# Altium PCB doorcontrollerv2.PcbDoc
Units mil, origin at the board's own origin, x right, y up, seen from the top; angles counter-clockwise.
Board outline 2665 x 1505 mil, 2 copper layers (Top Layer, Bottom Layer); 51 components, 62 nets, 230 pads, 48 vias.
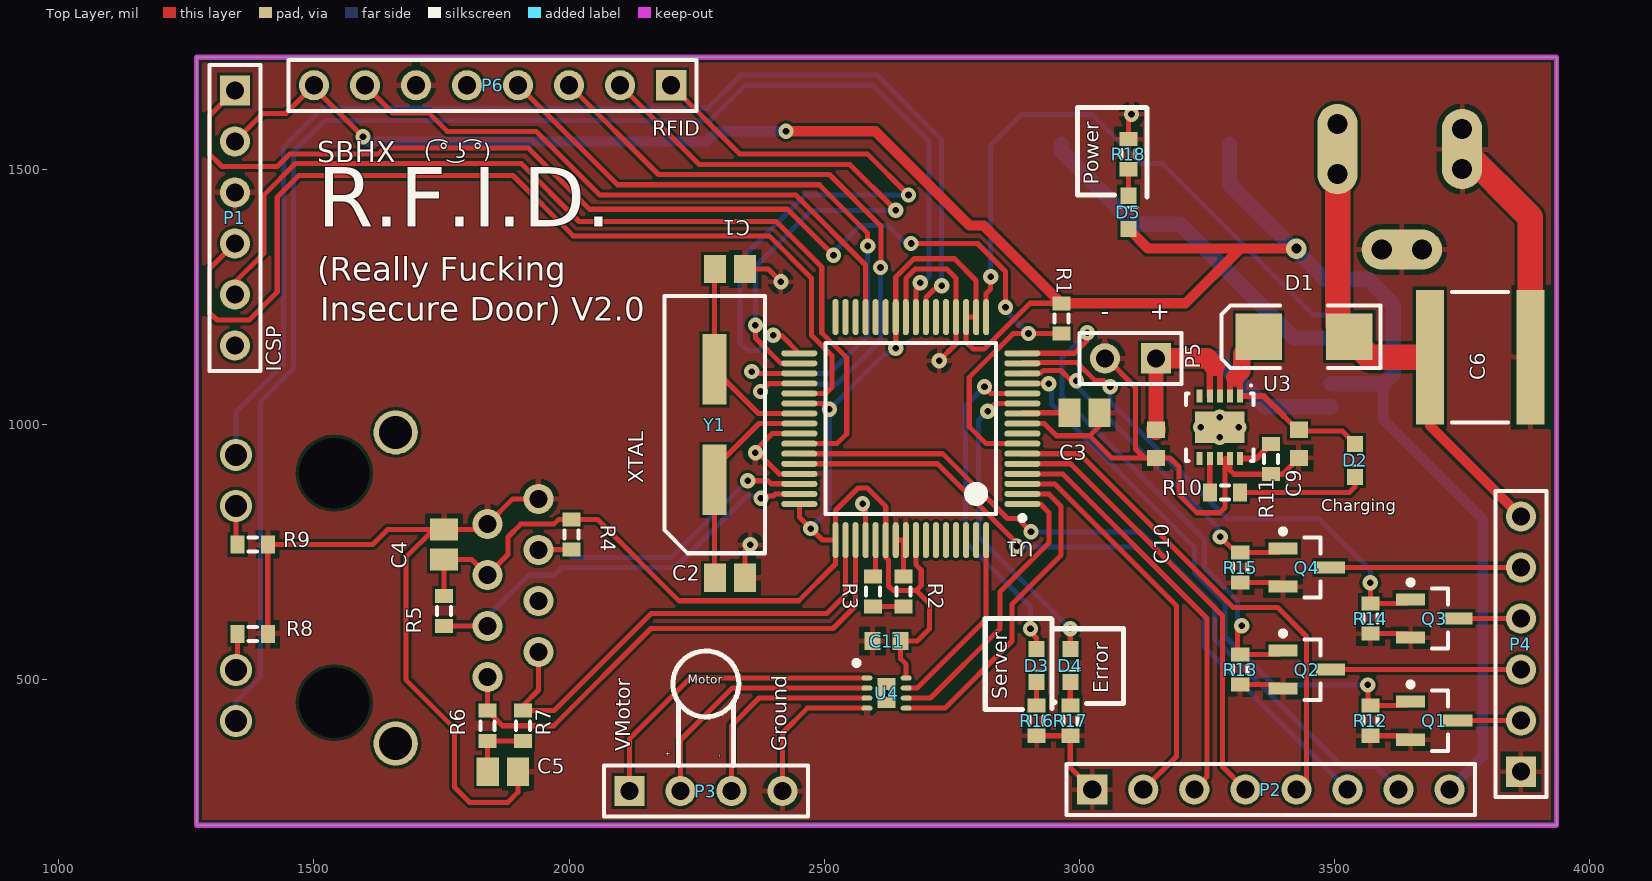
[diagram p0: Top Layer view]
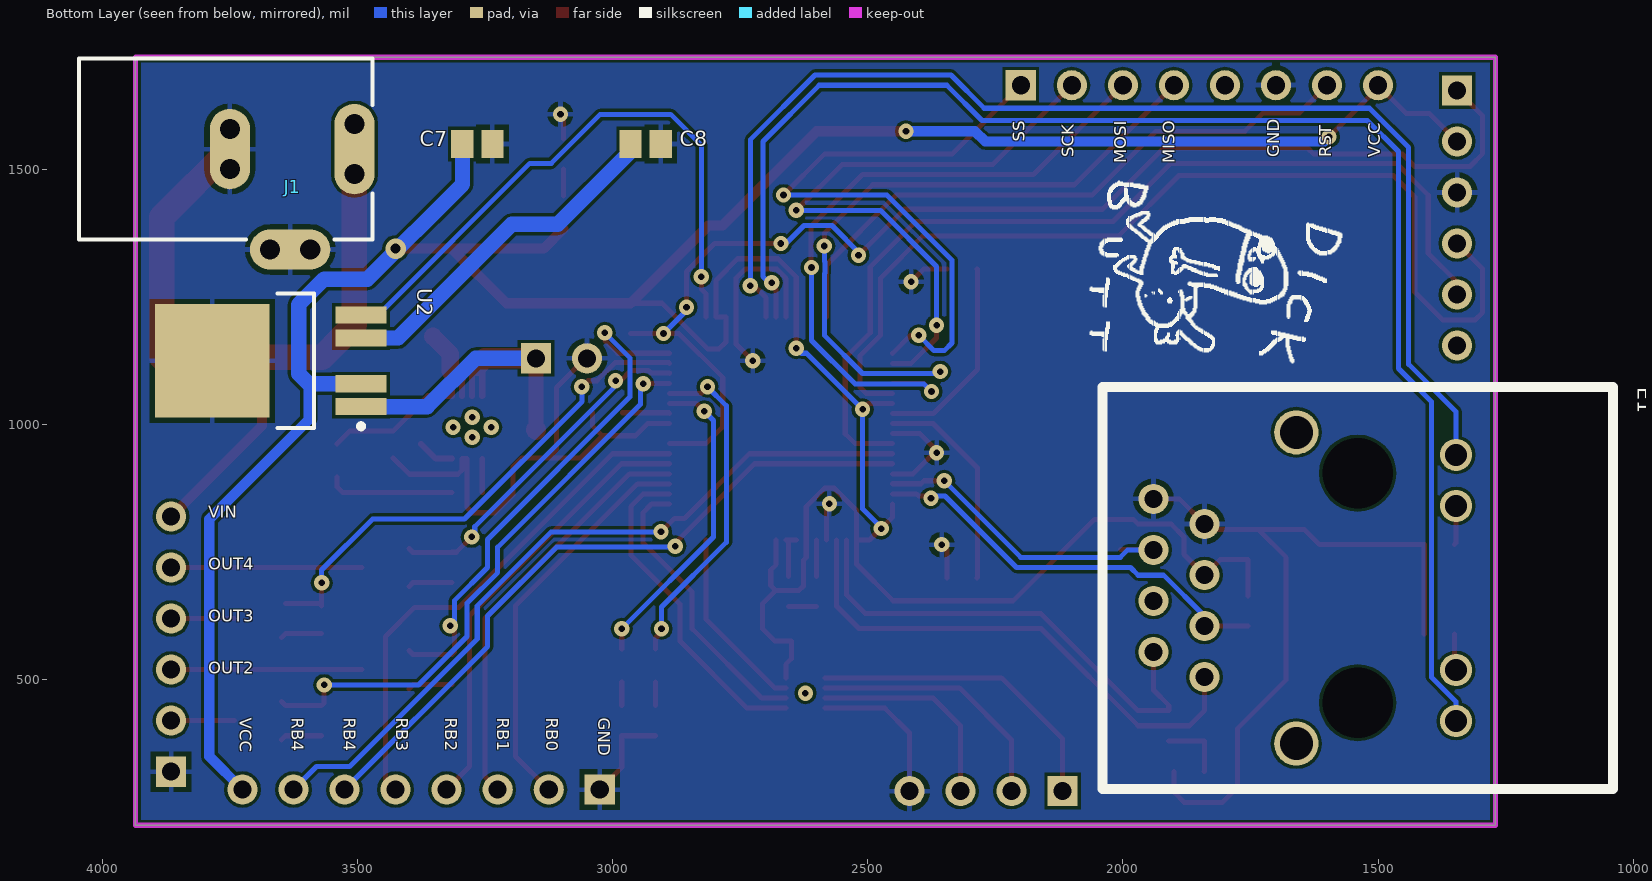
[diagram p1: Bottom Layer view, seen from below]

## Layer stack, top to bottom
Top Solder: solder mask 0.4, Solder Resist, Dk 3.5
Top Layer: signal copper 1.4
Dielectric1: dielectric 12.6, FR-4, Dk 4.8
Bottom Layer: signal copper 1.4
Bottom Solder: solder mask 0.4, Solder Resist, Dk 3.5

## Board outline
1270,215 1270,1720 3935,1720 3935,215

## Design rules (kind name [scope] priority, off if disabled: settings)
Clearance [All] p1: gap=6
DiffPairsRouting [All] p1: maxlimit=10 minlimit=5 mostfreqgap=10 toplayer_minwidth=10 toplayer_maxwidth=15 toplayer_prefwidth=15 bottomlayer_minwidth=10 bottomlayer_maxwidth=15 bottomlayer_prefwidth=15 maxuncoupledlength=500
HoleSize [All] p1: absolutevalues=TRUE maxlimit=265 minlimit=13 maxpercent=80.000 minpercent=20.000
MinimumAnnularRing [All] p1: minimumring=7
MinimumSolderMaskSliver [All] p1: minsoldermaskwidth=5
PolygonConnect [All] p1: connectstyle=Relief reliefconductorwidth=10 reliefentries=4 polygonreliefangle="90 Angle" airgapwidth=10
RoutingVias [All] p1: holewidth=28 width=50 viastyle="Through Hole" minholewidth=28 minwidth=50 maxholewidth=28 maxwidth=50
SilkToSolderMaskClearance SilkscreenOverComponentPads [IsPad] p1: minsilkscreentomaskgap=10 clearancetoexposedcopper=TRUE
SolderMaskExpansion [All] p1: expansion=4
Width [All] p1: maxlimit=200 minlimit=6 preferedwidth=10
26 further rules are at their usual default settings.

## Classes and differential pairs
net class RF[1..7]: RF0 RF1 RF2 RF3 RF4 RF5 RF6 RF7
net class RE[0..5]: RE0 RE1 RE2 RE3 RE4 RE5
component class U_EthernetPhy: C4 C5 E1 R4 R5 R6 R7 R8 R9
component class U_Processor: C1 C2 C3 C11 P1 R1 R2 R3 U1 Y1
component class DoorControllerv2: D3 D4 D5 P2 P3 P4 P6 Q1 Q2 Q3 Q4 R12 R13 R14 R15 R16 R17 R18 U4
net class RB[0..5]: RB0 RB1 RB2 RB3 RB4 RB5
component class U_PowerInput: C6 C7 C8 J1 U2
component class U_LiPoCharger: C9 C10 D1 D2 P5 R10 R11 U3
differential pair TPOUT: +TPOUT_P -TPOUT_N
differential pair TPIN: +TPIN_P -TPIN_N
differential pair XTAL: +XTAL_P -XTAL_N

## Components (designator, comment, footprint, x,y, rotation, side; value= is the part's Value field where it differs from the comment)
C1 "Cap Pol3" C0805 2315,1305 r0 top
C2 "Cap Pol3" C0805 2315,700 r0 top
C3 "Cap Pol3" C0805 3010,1023.27 r0 top
C4 "Cap Pol3" C0805 1755,765 r90 top
C5 "Cap Pol3" C0805 1870,320 r0 top
C6 "Cap Pol3" C2225 3785,1132.44 r0 top
C7 "Cap Pol3" C0805 3265,1550 r180 bottom
C8 "Cap Pol3" C0805 2935,1550 r180 bottom
C9 "Cap Semi" 1608[0603] 3430,962.44 r90 top
C10 "Cap Semi" 1608[0603] 3150,962.44 r90 top
C11 "Decoupling" 1608[0603] 2622,576 r180 top
D1 "SK33A" SMB 3440,1172.44 r180 top
D2 "LED0" "0603 LED" 3540,930 r270 top
D3 "Status1" "0603 LED" 2916,528 r270 top
D4 "Status2" "0603 LED" 2982,528 r270 top
D5 "Power" "0603 LED" 3096,1416 r90 top
E1 "8P8 MagJack" HR911105 1540,680 r270 bottom
J1 "PWR2.5" KLD-0202 4045,1540 r180 bottom
P1 "ICSP" HDR1X6 1345,1655 r270 top
P2 "Header 8" HDR1X8 3025,285 r0 top
P3 "Motor" HDR1X4 2118,282 r0 top
P4 "Header 6" HDR1X6 3865,320 r90 top
P5 "Battery Input" HDR1X2 3150,1130 r180 top
P6 "RFID" HDR1X8 2200,1665 r180 top
Q1 "NFET" SOT-23_M 3695,420 r0 top
Q2 "NFET" SOT-23_M 3445,520 r0 top
Q3 "NFET" SOT-23_M 3695,620 r0 top
Q4 "NFET" SOT-23_M 3445,720 r0 top
R1 "Res3" J1-0603 2964.53,1208.27 r270 top
R2 "Res3" J1-0603 2655,673.27 r270 top
R3 "Res3" J1-0603 2595,673.27 r90 top
R4 "Termination" J1-0603 2005,785 r90 top
R5 "Termination" J1-0603 1755,635 r90 top
R6 "Termination" J1-0603 1840,410 r270 top
R7 "Termination" J1-0603 1910,410 r270 top
R8 "Current Limit" J1-0603 1380,590 r180 top
R9 "Current Limit" J1-0603 1380,765 r180 top
R10 "Res3" J1-0603 3285,867.44 r0 top
R11 "" J1-0603 3375,932.44 r90 top
R12 "Res3" J1-0603 3570,420 r90 top
R13 "Res3" J1-0603 3315,520 r90 top
R14 "Res3" J1-0603 3570,620 r90 top
R15 "Res3" J1-0603 3315,720 r90 top
R16 "Res3" J1-0603 2916,420 r90 top
R17 "Res3" J1-0603 2982,420 r90 top
R18 "Res3" J1-0603 3096,1530 r270 top
U1 "PIC18F67J60-I/PT" TQFP-PT64_N 2669.53,992.24 r180 top
U2 "TLE4476" P-TO252-5-1 3670,1125 r0 bottom
U3 "MCP73213-A6AI/MF" DFN-MF10 3275,995 r270 top
U4 "1.8A H-Bridge" S-PWSON-N8 2622,474 r0 top
Y1 "XTAL" CSM-3X 2285,1000 r90 top

## Footprints (in the part's own frame and the unit in brackets; to place one, negate y for a bottom-side part, rotate by r counter-clockwise, add the part's x,y. Pads: shape width x height; smd on the part's side, far side on the other; paste and mask are expansions set on the pad)
"0603 LED" [mm]
  rect 0.8x0.8 smd: 1(-0.825,0) 2(0.825,0)
  silkscreen extent 0.25,-0.46 0.25,0.46
1608[0603] [mm] "Chip Capacitor, Body 1.6x0.8mm, IPC High Density"
  rect 0.8x0.9 smd: 1(-0.7,0) 2(0.7,0)
  body extent -0.87,-0.48 0.87,0.48, height 1.3
C0805 [mm] "Chip Capacitor, Body 2.0x1.3mm, IPC High Density"
  rect 1.1x1.4 smd: 1(-0.75,0) 2(0.75,0)
  body extent -1.1,-0.72 1.1,0.72, height 1.4
C2225 [mm] "Chip Capacitor, Body 5.7x6.4mm, IPC High Density"
  rect 1.4x6.7 smd: 1(-2.5,0) 2(2.5,0)
  silkscreen extent -1.4,-3.25 1.4,3.25, body extent -2.95,-3.4 2.95,3.4, height 1.4
CSM-3X [mm]
  rect 3.5x1.2 smd: 1(-2.75,0) 2(2.75,0)
  silkscreen extent -6.4,-2.5 6.4,2.5
DFN-MF10 [mm] "SON, 10-Leads, Body 3x3mm, Pitch 0.5mm, Microchip Recommended"
  rect 0.65x0.3 smd: 1(-1.55,1) 2(-1.55,0.5) 3(-1.55,0) 4(-1.55,-0.5) 5(-1.55,-1) 6(1.55,-1) 7(1.55,-0.5) 8(1.55,0) 9(1.55,0.5) 10(1.55,1)
  rect 1.55x2.48 smd: 11(0,0)
  silkscreen extent -2.12,-1.68 1.67,1.68, body extent -1.52,-1.52 1.52,1.52, height 1
HDR1X2 [mm] "Connector; Header; 2 Position"
  rect 1.5x1.5 hole 0.9: 1(0,0)
  round 1.5 hole 0.9: 2(2.54,0)
  silkscreen extent -1.27,-1.27 3.81,1.27
HDR1X4 [mm] "Connector; Header; 4 Position"
  rect 1.5x1.5 hole 0.9: 1(0,0)
  round 1.5 hole 0.9: 2(2.54,0) 3(5.08,0) 4(7.62,0)
  silkscreen extent -1.27,-1.27 8.89,1.27
HDR1X6 [mm] "Connector; Header; 6 Position"
  rect 1.5x1.5 hole 0.9: 1(0,0)
  round 1.5 hole 0.9: 2(2.54,0) 3(5.08,0) 4(7.62,0) 5(10.16,0) 6(12.7,0)
  silkscreen extent -1.27,-1.27 13.97,1.27
HDR1X8 [mm] "Connector; Header; 8 Position"
  rect 1.5x1.5 hole 0.9: 1(0,0)
  round 1.5 hole 0.9: 2(2.54,0) 3(5.08,0) 4(7.62,0) 5(10.16,0) 6(12.7,0) 7(15.24,0) 8(17.78,0)
  silkscreen extent -1.27,-1.27 19.05,1.27
HR911105 [mm] "HANRUN Ethernet MagJack"
  round 1.5 hole 0.9: 1(4.436,-7.62) 2(3.184,-10.16) 3(1.896,-7.62) 4(0.644,-10.16) 5(-0.644,-7.62) 6(-1.896,-10.16) 7(-3.184,-7.62) 8(-4.436,-10.16)
  round 1.6 hole 1.1: 9(6.625,4.9) 10(4.085,4.9) 11(-4.085,4.9) 12(-6.625,4.9)
  round 2.2 hole 1.65 unplated: NC(-7.745,-3.05) NC(7.745,-3.05)
  rect 1.5x1.5 hole 3.5 unplated: NC(-5.715,0) NC(5.715,0)
  silkscreen extent -10,-12.7 10,12.7
J1-0603 [mm] "Chip Resistor, Body 1.6x0.8mm, IPC High Density"
  rect 0.7x0.9 smd: 1(-0.75,0) 2(0.75,0)
  silkscreen extent -0.2,-0.35 0.2,0.35, body extent -0.85,-0.48 0.85,0.48, height 0.9
KLD-0202 [mm] "DC Power Jack, 2.5mm, KLD Series, PCB Mount"
  oval 2x4.5 all layers, no hole: 1(13.7,0)
  round 1.5 hole 1: 1A(13.7,-1.25) 1B(13.7,1.25) 2A(7.5,-1) 2B(7.5,1) 3A(9.5,-5) 3B(11.5,-5)
  oval 2x4 all layers, no hole: 2(7.5,0)
  oval 4x2 all layers, no hole: 3(10.5,-5)
  silkscreen extent 0,-4.5 14.6,4.5
P-TO252-5-1 [mm] "D-PAK, 5-Pads, Body 6.21x6.69mm (max), IPC Low Density"
  rect 2.55x0.85 smd: 1(-4.5,2.28) 2(-4.5,1.14) 4(-4.5,-1.14) 5(-4.5,-2.28)
  rect 5.7x5.65 smd: 3(2.9,0)
  silkscreen extent -4.62,-3.35 -0.35,3.38, body extent -2.15,-3.32 4.07,3.32, height 2.3
S-PWSON-N8 [mm] "WSON, 8-Leads, Body 2.00x2.00mm, Pitch 0.50mm, Thermal Pad 0.90x1.50mm, IPC Low Density"
  oval 0.55x0.25 smd: 1(-0.975,0.75) 2(-0.975,0.25) 3(-0.975,-0.25) 4(-0.975,-0.75) 5(0.975,-0.75) 6(0.975,-0.25) 7(0.975,0.25) 8(0.975,0.75)
  rect 0.9x1.5 smd: 9(0,0)
  silkscreen extent -1.62,1.38 -1.37,1.62, body extent -1.05,-1.05 1.05,1.05, height 1
SMB [mm] "DO-214-AA/SMB; 2 C-Bend Leads; Body 5.3 x 3.6 mm, inc. leads (LxW)"
  rect 2.3x2.3 smd: 1(-2.25,0) 2(2.25,0)
  silkscreen extent -3.8,-1.55 4.1,1.55
SOT-23_M [mm] "SOT23, 3-Leads, Body 2.9x1.3mm, Pitch 0.95mm, Lead Span 2.5mm, IPC Low Density"
  rect 1.45x0.6 smd: 1(-1.175,0.95) 2(-1.175,-0.95) 3(1.175,0)
  silkscreen extent -1.3,-1.5 0.7,1.92, body extent -0.7,-1.5 0.7,1.5, height 1.1
TQFP-PT64_N [mm] "Thin QFP, 64-Leads, Body 10x10mm, Pitch 0.5mm, IPC Medium Density"
  oval 1.8x0.3 smd: 1(-5.55,3.75) 2(-5.55,3.25) 3(-5.55,2.75) 4(-5.55,2.25) 5(-5.55,1.75) 6(-5.55,1.25) 7(-5.55,0.75) 8(-5.55,0.25) 9(-5.55,-0.25) 10(-5.55,-0.75) 11(-5.55,-1.25) 12(-5.55,-1.75) 13(-5.55,-2.25) 14(-5.55,-2.75) 15(-5.55,-3.25) 16(-5.55,-3.75) 33(5.55,-3.75) 34(5.55,-3.25) 35(5.55,-2.75) 36(5.55,-2.25) 37(5.55,-1.75) 38(5.55,-1.25) 39(5.55,-0.75) 40(5.55,-0.25) 41(5.55,0.25) 42(5.55,0.75) 43(5.55,1.25) 44(5.55,1.75) 45(5.55,2.25) 46(5.55,2.75) 47(5.55,3.25) 48(5.55,3.75)
  oval 0.3x1.8 smd: 17(-3.75,-5.55) 18(-3.25,-5.55) 19(-2.75,-5.55) 20(-2.25,-5.55) 21(-1.75,-5.55) 22(-1.25,-5.55) 23(-0.75,-5.55) 24(-0.25,-5.55) 25(0.25,-5.55) 26(0.75,-5.55) 27(1.25,-5.55) 28(1.75,-5.55) 29(2.25,-5.55) 30(2.75,-5.55) 31(3.25,-5.55) 32(3.75,-5.55) 49(3.75,5.55) 50(3.25,5.55) 51(2.75,5.55) 52(2.25,5.55) 53(1.75,5.55) 54(1.25,5.55) 55(0.75,5.55) 56(0.25,5.55) 57(-0.25,5.55) 58(-0.75,5.55) 59(-1.25,5.55) 60(-1.75,5.55) 61(-2.25,5.55) 62(-2.75,5.55) 63(-3.25,5.55) 64(-3.75,5.55)
  silkscreen extent -5.68,-4.25 4.25,4.57, body extent -5,-5 5,5, height 1.2

## Part data
C1 C2 C3 C4 C5 C6 C7 C8: "Polarized Capacitor (Surface Mount)"
C9 C10: "Capacitor (Semiconductor SIM Model)"
C11: library part "Cap Semi", "Capacitor (Semiconductor SIM Model)"
D1: library part "D Schottky", "Schottky Diode"
D2: "Typical INFRARED GaAs LED"
D3 D4 D5: library part LED0, "Typical INFRARED GaAs LED"
J1: "Low Voltage Power Supply Connector"
P1: library part "Header 6", "Header, 6-Pin"
P2: "Header, 8-Pin"
P3: library part "Header 4", "Header, 4-Pin"
P4: "Header, 6-Pin"
P5: library part "Header 2", "Header, 2-Pin"
P6: library part "Header 8", "Header, 8-Pin"
Q1 Q2 Q3 Q4: library part AO3418, "30V 3.4A N channel HEXFET"
R1 R2 R3 R10 R12 R13 R14 R15 R16 R17 R18: "Resistor"
R4 R5 R6 R7 R8 R9 R11: library part Res3, "Resistor"
U1: "High Performance, 1-Mbit Flash Microcontroller with Ethernet, 128K Flash, 64-Pin TQFP, Industrial Temperature Range"
U3: "Dual-Cell Li-Ion / Li-Polymer Battery Charge Management Controller with OVP, 13V, 10-Pin DFN, Industrial Temperature"
U4: library part "DRV8837 H-Bridge", "1.8A H0bridge with integrated motor drive FETs"
Y1: "Crystal Oscillator"

## Via types
v1: diameter 30, hole 13, Top Layer to Bottom Layer, 43 vias
v2: diameter 30, hole 13, Top Layer to Bottom Layer, tented top, 4 vias
v3: diameter 40, hole 20, Top Layer to Bottom Layer, 1 vias

## Nets (pads, with @x,y where several pads share a name; then routed paths per layer and width w, separated by ;. In a path a pad name is that pad's centre, name@x,y a point inside that pad or via, vN(x,y) a via of type N, cw(c..) or ccw(c..) an arc to the next point about the centre after c; other vN are vias at no path point)
5V: C8.1 U2.4 | length 694.5
  Bottom Layer w30: C8.1@2964,1550 2964,1536 3107.6,1392.4 3197.6,1392.4 3420.12,1169.88 U2.4
\R\E\S\E\T\: P1.1 R1.2 U1.7 | length 2455.3
  Top Layer w10: P1.1 1295,1605 1295,1531 1320,1506 1428,1506 1452,1530 1626,1530 1638,1542 1920,1542 2040,1422 2428,1422 v1(2518,1332) ; v1@2680,1355 2800,1355 2855,1300 v1(2855,1230) ; U1.7 2817.28,962.72 2784,996 2784,1092.74 2870,1178.74 v1(2900,1178.74) R1.2 R1.2@2965,1178.74
  Bottom Layer w10: v1(2518,1332) 2515,1335 2570,1390 2625,1390 2660,1355 v1@2680,1355 ; v1(2855,1230) 2855,1223.74 v1(2900,1178.74)
  other v1: 2670,1355
BATT: C10.2 P5.1 U2.1 U3.3 U3.4 | length 769.4
  Top Layer w12: U3.4 3255.31,1105.31 ; U3.3 3275,1105
  Top Layer w15: 3255.31,1105.31 3265,1115 3275,1105
  Top Layer w30: C10.2 P5.1
  Top Layer w40: P5.1 3250,1130 3265,1115
  Bottom Layer w30: P5.1 3268.43,1130 3363.2,1035.24 U2.1
GND: C1.2 C2.2 C3.2 C4.2 C5.2 C6.2 C7.2 C8.2 C9.1 C10.1 C11.2 E1.7 E1.8 J1.2 J1.2A J1.2B J1.3 J1.3A J1.3B P1.3 P2.1 P3.4 P4.1 P5.2 P6.6 Q1.2 Q2.2 Q3.2 Q4.2 R2.1 R8.1 R9.1 R11.1 R12.1 R13.1 R14.1 R15.1 R16.1 R17.1 R18.1 U1.9 U1.20 U1.25 U1.41 U1.45 U1.52 U1.55 U1.56 U2.3 U3.8 U3.9 U4.4 | length 4790
  Top Layer w10: R8.1 R9.1 1615,765 1644.53,794.53 C4.2@1734.53,794.53 ; C5.2 1899.53,279.53 1880,260 1805,260 1775,290 1775,405 1680,500 1680,740 C4.2@1734.53,794.53 ; E1.8 1889.29,854.65 E1.7 1829.17,794.53 C4.2 C4.2@1734.53,794.53 ; C2.2 2344.53,754.53 v1(2355,765) ; C1.2 2390,1305 v1(2415,1280) ; P3.4 2418,396 2466.47,444.47 U4.4 ; U1.45 2411.34,903.66 2365,950 2397.4,982.4 U1.41 ; v1(2575,845) 2580.94,839.06 U1.52 ; U1.55 U1.56 2655,769.06 R2.1 ; U1.25 2659.68,1286.45 2678.23,1305 2740,1305 2758.11,1286.89 U1.20 2758.11,1158.11 v1(2725,1125) ; U1.9 2931.18,1002.09 2955,978.27 3020,978.27 ; R16.1 R17.1 2982,328 P2.1 ; C3.2 3039.53,997.8 3020,978.27 ; P5.2 3052.77,1130 3110,1072.77 3110,952.44 3127.56,934.88 ; R18.1 3096,1602 v1(3102,1608) ; R13.1 3390.87,490.47 Q2.2 ; R15.1 3390.87,690.47 Q4.2 ; C9.1 3398.03,902.91 R11.1 3303.09,902.91 3294.68,911.32 U3.9 3285,933.98 3285,837.44 3275,827.44 3230,827.44 3195,862.44 3195,917.44 3177.56,934.88 C10.1 3127.56,934.88 ; R12.1 3640.87,390.47 Q1.2 ; R14.1 3640.87,590.47 Q3.2 ; 3020,978.27 3063.39,934.88 3127.56,934.88
  Top Layer w50: J1.2 3883.43,1406.3 C6.2
  other v1: 2365,945
MISO: P6.4 U1.35 | length 1333.3
  Top Layer w10: P6.4 2095,1470 2490,1470 2585,1375 v1(2585,1350) ; v1@2370,1100 2450.51,1100 U1.35
  Bottom Layer w10: v1@2370,1100 2510,1100 2585,1175 2585,1296.23 2584,1297.23 2584,1318.77 2585,1319.77 v1(2585,1350)
  other v1: 2358,1104
MOSI: P6.3 U1.36 | length 1308.7
  Top Layer w10: P6.3 2175,1490 2510,1490 2611,1389 2611,1309 v1(2610,1308) ; v1(2375,1065) 2390.83,1080.83 U1.36
  Bottom Layer w10: v1(2375,1065) 2390,1080 2525,1080 2610,1165 v1(2610,1308)
MOTOR1: P3.2 U4.2 | length 507.8
  Top Layer w10: P3.2 2218,382 2319.84,483.84 U4.2
MOTOR2: P3.3 U4.3 | length 416
  Top Layer w10: P3.3 2318,410 2372.16,464.16 U4.3
NetC3_1: C3.1 U1.10 | length 93.1
  Top Layer w10: U1.10 2889.53,1023.27 C3.1
NetC5_1: C5.1 R6.2 R7.2 | length 130.7
  Top Layer w10: C5.1 1840,320.47 R6.2 R7.2
NetC9_2: C9.2 D1.2 D2.1 U3.1 U3.2 | length 444.6
  Top Layer w10: 3400,1017.44 3429.88,987.56 3514.92,987.56 D2.1
  Top Layer w12: U3.2 3294.68,1082.13 3305,1092.44 3314.37,1083.07 U3.1 3361.42,1056.02 3400,1017.44
  Top Layer w35: 3305,1092.44 3318,1105.44 3318,1139.02 D1.2
NetD2_2: D2.2 R10.2 | length 249.1
  Top Layer w10: R10.2 3529.06,867.44 3540,878.39 D2.2
NetD3_2: D3.2 R16.2 | length 46
  Top Layer w10: R16.2 D3.2
NetD4_2: D4.2 R17.2 | length 46
  Top Layer w10: R17.2 D4.2
NetD5_2: D5.2 R18.2 | length 52
  Top Layer w10: D5.2 R18.2
NetE1_9: E1.9 U1.24 | length 2869.5
  Top Layer w10: U1.24 2679.37,1264.37 2690,1275 2688,1277 v1(2688,1278)
  Bottom Layer w10: E1.9 1347.09,457.09 1395,505 1395,1045 1460,1110 1460,1535 1521,1596 2276,1596 2345,1665 2595,1665 2705,1555 2705,1290 2690,1275 2688,1277 v1(2688,1278)
NetE1_10: E1.10 R8.2 | length 72.2
  Top Layer w10: E1.10 1350.47,522.56 R8.2
NetE1_11: E1.11 R9.2 | length 77.2
  Top Layer w10: E1.11 1347.09,768.39 R9.2
NetE1_12: E1.12 U1.23 | length 2430.5
  Top Layer w10: U1.23 2699.05,1249.06 2730,1280 v1@2730,1266
  Bottom Layer w10: E1.12 1347.09,1025.37 1440,1118.28 1440,1543.28 1516.72,1620 2271.72,1620 2336.72,1685 2603.28,1685 2730,1558.28 v1@2730,1266
  other v1: 2730,1272
NetR2_2: R2.2 R3.1 | length 55
  Top Layer w10: R3.1@2600,643.74 R2.2
NetR3_2: R3.2 U1.53 | length 71.2
  Top Layer w10: R3.2@2600,702.8 2600,773.11 U1.53
NetR10_1: R10.1 U3.7 | length 66.6
  Top Layer w10: U3.7 3255.31,867.6 R10.1
NetR11_2: R11.2 U3.10 | length 72.2
  Top Layer w12: U3.10 3347.01,933.98 R11.2
NetU1_31: U1.31
NetU1_32: U1.32
OUT1: P4.2 Q1.3 | length 123.7
  Top Layer w10: Q1.3 P4.2
OUT2: P4.3 Q2.3 | length 373.7
  Top Layer w10: Q2.3 P4.3
OUT3: P4.4 Q3.3 | length 123.7
  Top Layer w10: Q3.3 P4.4
OUT4: P4.5 Q4.3 | length 373.7
  Top Layer w10: Q4.3 P4.5
PGC: P1.5 U1.42 | length 1869.5
  Top Layer w10: P1.5 1345,1279 1401.53,1335.53 1401.53,1449.53 1464,1512 1905.54,1512 2019.54,1398 2406,1398 2495,1309 2495,1180 2544,1131 2544,982.27 2524.45,962.72 U1.42
PGD: P1.4 U1.37 | length 1950.7
  Top Layer w10: P1.4 1295,1305 1295,1220 1310,1205 1373,1205 1428,1260 1428,1446 1470,1488 1890,1488 2008,1370 2392,1370 2475,1287 2475,1175 2515,1135 2515,1073.27 2502.87,1061.14 U1.37
RB0: P2.2 U1.3 | length 787.9
  Top Layer w10: U1.3 2951.02,883.98 3190,645 3190,350 P2.2
RB1: P2.3 U1.4 | length 825
  Top Layer w10: U1.4 2966.69,903.66 3250,620.36 3250,310 P2.3
RB2: P2.4 U1.5 | length 874.6
  Top Layer w10: U1.5 2982.36,923.35 3280,625.71 3280,330 P2.4
RB3: P2.5 U1.6 | length 1013.6
  Top Layer w10: U1.6 3000.03,943.03 3301.06,642 3388,642 3445,585 3445,305 P2.5
RB4: P2.6 U1.44 | length 1385.1
  Top Layer w10: U1.44 2721.65,923.35 2875,770 2875,760 v1(2877,762)
  Bottom Layer w10: v1(2877,762) 2875,760 3110,760 3245,625 3245,565 P2.6
RB5: P2.7 U1.43 | length 1484.6
  Top Layer w10: U1.43 2731.97,943.03 2858.93,816.07 2878.93,816.07 v1(2905,790)
  Bottom Layer w10: v1(2905,790) 3120,790 3265,645 3265,580 3515,330 3580,330 P2.7
RE0: U1.2 U4.5 | length 651.9
  Top Layer w10: U4.5 2736.47,444.47 2868,576 2868,648 2964,744 2964,840 2939.71,864.29 U1.2
RE1: U1.1 U4.6 | length 566.5
  Top Layer w10: U4.6 2708.16,464.16 2844,600 2844,672 2940,768 2940,828 2923.39,844.61 U1.1
RE2: U1.64 U4.7 | length 367.5
  Top Layer w10: U4.7 2682,483.84 2817.17,619.01 U1.64
RE3: U1.63
RE4: U1.62
RE5: U1.61
RF1: U1.17 U2.5 | length 1195.5
  Top Layer w10: U1.17 2817.17,1257.17 2826,1266 v1(2826,1290)
  Bottom Layer w10: v1(2826,1290) 2826,1548 2886,1608 3024,1608 3120,1512 3162,1512 3459.24,1214.76 U2.5
RF2: Q2.1 R13.2 U1.16 | length 1034.7
  Top Layer w10: U1.16 2989.88,1139.88 3015,1165 v1(3015,1180) ; v1@3310,605 3310,554.53 R13.2 3390.87,549.53 Q2.1
  Bottom Layer w10: v1(3015,1180) 2966,1131 2966,1054 3245,775 3245,720 3310,655 v1@3310,605
  other v1: 3318,606
RF3: Q3.1 R14.2 U1.15 | length 1009.2
  Top Layer w10: U1.15 2889.83,1122 2994.77,1122 3030.77,1086 3048,1086 v1(3060,1074) ; R14.2@3570,645 R14.2 ; v1(3570,690) R14.2 ; Q3.1@3640.87,649.53 R14.2
  Bottom Layer w10: v1(3060,1074) 3060,1045 3290,815 3470,815 3570,715 v1(3570,690)
RF4: Q4.1 R15.2 U1.14 | length 691.4
  Top Layer w10: U1.14 2888.52,1101 2924.23,1101 2929.23,1106 2964,1106 2984,1086 v1(2994,1086) ; v1(3276,780) 3306,750 R15.2@3314.53,750 ; R15.2 3390.87,749.53 Q4.1
  Bottom Layer w10: v1(2994,1086) 2984,1086 3270,800 3270,786 v1(3276,780)
RF5: Q1.1 R12.2 U1.13 | length 1134.1
  Top Layer w10: U1.13 2939.17,1080.83 v1(2940,1080) ; v1(3565,490) 3565,454.53 R12.2 3640.87,449.53 Q1.1
  Bottom Layer w10: v1(2940,1080) 2945,1075 2945,1052.37 2945.16,1052.22 2945.16,1039.84 3225,760 3225,710 3285,650 3285,585 3380,490 v1(3565,490)
RF6: D3.1 U1.12 | length 664
  Top Layer w10: v1(2814,1074) 2826.86,1061.14 U1.12 ; v1@2901,597 2916,582 D3.1
  Bottom Layer w10: v1(2814,1074) 2777,1037 2777,769.64 2904,642.64 v1(2904,600)
RF7: D4.1 U1.11 | length 622
  Top Layer w10: v1(2820,1026) 2835.46,1041.46 U1.11 ; D4.1 v1(2982,600)
  Bottom Layer w10: v1(2820,1026) 2802,1008 2802,780 2976,606 v1(2982,600)
RST: P6.7 U1.29 | length 1229
  Top Layer w10: P6.7 1653.75,1611.25 1724.75,1611.25 1761.25,1574.75 1935.25,1574.75 2060,1450 2444,1450 2580.94,1313.06 U1.29
SCK: P6.2 U1.34 | length 1205.1
  Top Layer w10: P6.2 2255,1510 2550,1510 v1@2637.5,1422.5 ; v1(2365,1195) 2365,1170 2414.8,1120.2 U1.34
  Bottom Layer w10: v1(2365,1195) 2365,1309.85 2475.15,1420 v1(2640,1420)
SS: P6.1 U1.33 | length 1248.4
  Top Layer w10: P6.1 2335,1530 2585,1530 v1(2665,1450) ; v1(2400,1175) 2415.91,1175 U1.33
  Bottom Layer w10: v1(2400,1175) 2370,1145 2350,1145 2335,1160 2335,1322.28 2462.72,1450 v1(2665,1450)
TPIN_N: E1.6 R4.1 U1.46 | length 646.9
  Top Layer w10: E1.6 1940.83,755.47 R4.1 ; v1(2350,890) 2390,890 2395.71,884.29 U1.46@2451.02,884.29
  Bottom Layer w10: E1.6 1990.35,754.65 2005,740 2200,740 v1(2350,890)
TPIN_P: E1.3 R5.1 U1.47 | length 826.1
  Top Layer w10: R5.1 1839.88,605.47 E1.3 ; v1(2376,856) 2380,860 2400,860 2404.29,864.29 U1.47
  Bottom Layer w10: E1.3 1840,625 1920,705 1970,705 1985,720 2208.28,720 2348.28,860 2380,860 v1(2376,856)
TPOUT_N: E1.2 R7.1 U1.50 | length 960.3
  Top Layer w10: E1.2 1940,480 1910,450 R7.1 1970.47,439.53 2160.95,630 2505,630 2541.57,666.57 U1.50
TPOUT_P: E1.1 R6.1 U1.51 | length 1025.7
  Top Layer w10: E1.1 R6.1 1869.53,410 1970,410 2160.47,600.47 2517.23,600.47 2561.26,644.5 U1.51
VCC: C4.1 C7.1 C11.1 D5.1 E1.5 P1.2 P2.8 P6.8 R1.1 R4.2 R5.2 U1.18 U1.19 U1.26 U1.38 U1.48 U1.49 U1.54 U1.57 U2.2 U4.8 | length 7375.2
  Top Layer w10: P1.2 1400,1610 1445,1610 P6.8 1500,1660 v1(1596,1564) ; R5.2 C4.1 1809.88,735.47 E1.5 1880,745.35 1880,780 1905,805 1970,805 1979.53,814.53 R4.2 2055.47,814.53 2215,655 2450,655 2521.89,726.89 U1.49 ; U1.48 2451.02,818.98 2496.26,773.74 U1.49 ; U1.38 2498.54,1041.46 v1(2510,1030) ; v1(2640,1150) U1.26 2640,1289.4 2675.6,1325 2755,1325 2797.48,1282.52 U1.18 U1.19 2777.8,1162.2 2791.73,1148.27 2813.27,1148.27 2902.8,1237.8 R1.1 ; U4.8 2660.39,530.39 2649.56,541.21 C11.1 2682,576 2706,600 2706,649 2680,675 ; U1.57 2679.37,725.63 2690,715 2690,685 2680,675 ; U1.49 2521.89,831.89 2566,876 2584,876 2620.31,839.69 U1.54 2620.31,740 2626,734.31 2626,684 2635,675 2680,675
  Top Layer w20: v1(2425,1575) 2600,1575 2785,1390 2812.32,1390 R1.1 3207.8,1237.8 3315,1345 ; D5.1 3134.52,1345 3315,1345 ; v3(3425,1345) 3315,1345
  Bottom Layer w10: E1.5@1840,700 E1.5 ; v1@2475,800 2510,835 v1(2510,1030) 2620,1140 2630,1140 v1(2640,1150)
  Bottom Layer w20: v1(1596,1564) 1605,1555 2270,1555 2290,1575 v1(2425,1575) ; 3595.12,1080.12 3595.12,1009.88 3790,815 3790,350 P2.8
  Bottom Layer w30: C7.1@3294,1550 3294,1471 3480,1285 3565,1285 3615,1235 3615,1100 3595.12,1080.12 U2.2
  other v1: 2473.64,796.36
VIN: C6.1 D1.1 J1.1 J1.1A J1.1B P4.6 | length 888.8
  Top Layer w20: C6.1 3686.57,998.43 P4.6
  Top Layer w50: J1.1A 3505.63,1195.39 D1.1 3568.58,1132.44 C6.1
VMOT: P3.1 U4.1 | length 617.1
  Top Layer w10: P3.1 2118,384 2237.53,503.53 U4.1
XTAL_N: C2.1 U1.40 Y1.1 | length 417.3
  Top Layer w10: C2.1 2285,700.47 Y1.1 2285,915 2372.09,1002.09 U1.40
XTAL_P: C1.1 U1.39 Y1.2 | length 398.6
  Top Layer w10: C1.1 2285,1304.53 Y1.2 2371.18,1022.09 U1.39@2451.02,1022.09
pads on no net: E1.4 E1.NC P1.6 P6.5 U1.8 U1.21 U1.22 U1.27 U1.28 U1.30 U1.58 U1.59 U1.60 U3.5 U3.6 U3.11 U4.9
copper on no net:
  other v1: 2622,474
  other v2: 3275,975.32 3237.6,995 3312.4,995 3275,1014.68

## Polygon pours and split planes (outlines as drawn)
GND on Bottom Layer "Top Layer-No Net1" (solid, pour order 6): 1270,215 1270,1720 3935,1720 3935,215
GND on Top Layer "Top Layer-No Net" (solid, pour order 3): 1270,215 1270,1720 3935,1720 3935,215

## Keep-outs
Keep-Out Layer:
  the board outline again, w10

## Silkscreen, mask and mechanical layers (free items; w line width, h text height)
Top Overlay:
  circle w10: c2268,492 r64.62
  lines w10: 2214,332 2214,456 ; 2322,332 2322,456 ; 2888.59,442 2815.4,442 2815.4,620.4 2943.6,620.4 2946,618 2946,444 ; 2952,456 2946,456 2946,600 3085.81,600 3086.59,600.77 3086.59,454 3013.94,454 ; 3068.59,1450 2995.94,1450 2995.94,1617.55 2995.94,1621.61 3130.39,1621.61 3132,1620 3132,1446
  text "( ͡° ͜ʖ ͡°)" at 1716,1512 h50
  text "SBHX" at 1506,1500 h70
  text "Power" at 3048,1470 h50 r90
  text "R.F.I.D." at 1506,1350 h200
  text "(Really Fucking" at 1506,1266 h80
  text "-" at 3042,1194 h60
  text "+" at 3138,1194 h60
  text "Insecure Door) V2.0" at 1512,1188 h80
  text "Charging" at 3474,822 h40
  text "Motor" at 2232,486 h30
  text "Error" at 3066,474 h50 r90
  text "Server" at 2868,462 h50 r90
  text "VMotor" at 2130,360 h50 r90
  text "Ground" at 2436,360 h50 r90
  text "+" at 2202,348 h20 r90
  text "-" at 2304,348 h20 r90
Bottom Overlay:
  drawing of 1040 lines, arcs and shapes, not listed
  text "SS" at 2184,1554 h40 r270
  text "VCC" at 1488,1524 h40 r270
  text "RST" at 1584,1524 h40 r270
  text "GND" at 1686,1524 h40 r270
  text "SCK" at 2088,1524 h40 r270
  text "MISO" at 1890,1512 h40 r270
  text "MOSI" at 1986,1512 h40 r270
  text "VIN" at 3792,810 h40
  text "OUT4" at 3792,708 h40
  text "OUT3" at 3792,606 h40
  text "OUT2" at 3792,504 h40
  text "GND" at 3036,426 h40 r90
  text "RB0" at 3138,426 h40 r90
  text "RB1" at 3234,426 h40 r90
  text "RB2" at 3336,426 h40 r90
  text "RB3" at 3432,426 h40 r90
  text "RB4" at 3534,426 h40 r90
  text "RB4" at 3636,426 h40 r90
  text "VCC" at 3738,426 h40 r90
Mechanical 1:
  the board outline again, w10
Mechanical 5:
  lines w10: 1271,215 3934,215 3935,216 3935,1716 3931,1720 1272,1720 1272,216 1271,215

## Dimensions
1270,215 to 3935,215 on Mechanical 13
1270,215 to 1270,1720 on Mechanical 13

## Text inside footprints (layer, text, board x,y; h text height)
J1: Mechanical 1 "Alert PCB fab to slot details" at 4033.74,1778.82 h50; Mechanical 1 "Assign keep-out area to slot" at 4033.74,1798.5 h50; Mechanical 1 "Mech 1 - Slot cut-out" at 4033.74,1759.13 h50; Mechanical 1 "Mech 2 - Clearance, move to internal plane if present" at 4033.74,1739.44 h50